# Altium PCB TIDA-00620.PcbDoc (part 1 of 2)
Units mil, origin at the board's own origin, x right, y up, seen from the top; angles counter-clockwise.
Board outline 3000 x 1500 mil, 2 copper layers (Top Layer, Bottom Layer), stack 64.8 mil thick; 82 components, 49 nets, 221 pads, 316 vias.
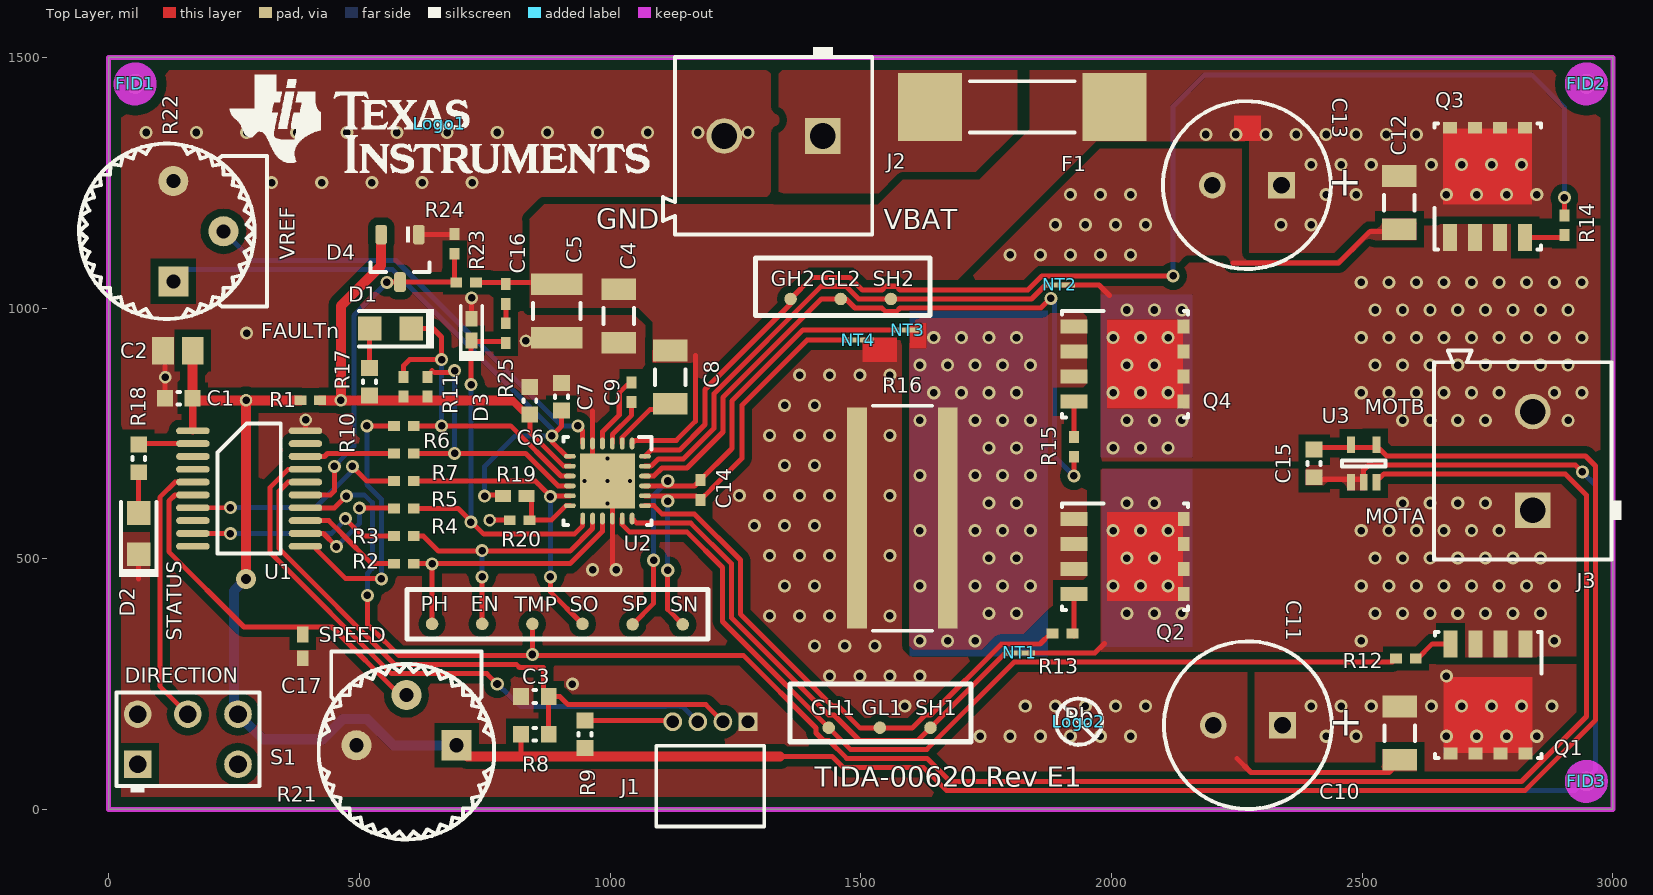
[diagram p0: Top Layer view]
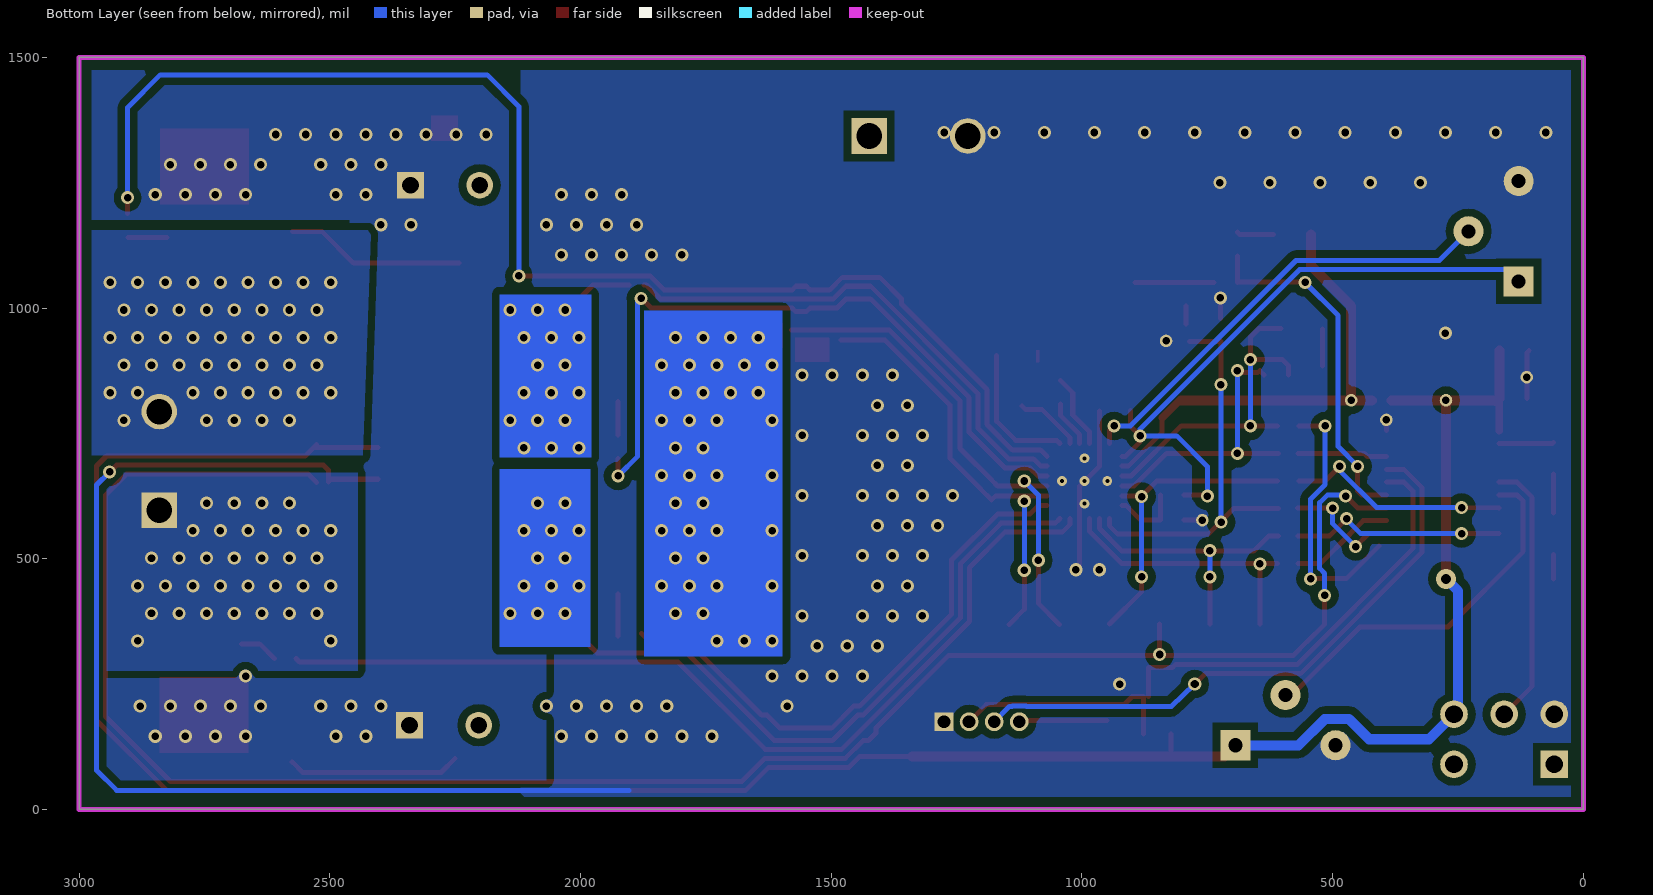
[diagram p1: Bottom Layer view, seen from below]

## Layer stack, top to bottom
Top Solder: solder mask 0.4, Solder Resist, Dk 3.5
Top Layer: signal copper 2.8
Dielectric1: core 59.2, FR-4, Dk 4.8
Bottom Layer: signal copper 2.8
Bottom Solder: solder mask 0.4, Solder Resist, Dk 3.5

## Board outline
0,0 0,1500 3000,1500 3000,0

## Design rules (kind name [scope] priority, off if disabled: settings)
AcuteAngle [All] p1: minimum=4.50000000000000E+0001 checktracksonly=FALSE
AssemblyTestPointUsage [All] p1: valid=2
Clearance Clearance_Keepouts [((IsTrack Or IsArc) And Not InPoly) And IsFree and IsKeepOut vs ((IsTrack Or IsArc) And Not InPoly) And IsFree and IsKeepOut] p1: gap=0
Clearance Clearance_BoardEdge_MountingHoles [OnCopper and InComponentClass('Mounting Holes') vs IsKeepOut] p2: gap=40
Clearance Clearance_BoardEdge_Poly [OnCopper and InPoly vs IsKeepOut] p3: gap=20
Clearance Clearance_BoardEdge [OnCopper and Not InComponentClass('Logo') and not InComponentClass('FiducialMark') and not InRegion(1000,500,4000,800) and Not IsKeepout vs IsKeepOut] p4: gap=20
Clearance Clearance_Poly [InPolygon] p5: gap=15
Clearance [All] p6: gap=7.87
ComponentClearance ComponentClearance_MountingHoles_FiducialMarks [InComponentClass('Mounting Holes') vs InComponentClass('FiducialMark')] p1: gap=50 collisioncheckmode=3 verticalgap=10 showdistances=FALSE
ComponentClearance ComponentClearance_Shunt [InComponentClass('Header') vs InComponentClass('Shunt')] p2: gap=0 collisioncheckmode=3 verticalgap=0 showdistances=FALSE
ComponentClearance ComponentClearance_Logo [InComponentClass('Logo')] p3: gap=50 collisioncheckmode=3 verticalgap=10 showdistances=FALSE
ComponentClearance ComponentClearance_ScrewToNut [(HasFootprint('NY PMS 440 0025 PH')) vs (HasFootprint('Keystone_1902C'))] p4: gap=5 collisioncheckmode=3 verticalgap=10 showdistances=FALSE
ComponentClearance ComponentClearance_MountingHoles [InComponentClass('Mounting Holes')] p5: gap=250 collisioncheckmode=3 verticalgap=100000 showdistances=FALSE
ComponentClearance ComponentClearance_SmallPassives [HasFootprint('0201*') or HasFootprint('0402*') or HasFootprint('0508') or HasFootprint('0603*') or HasFootprint('0612') or HasFootprint('0805*') or HasFootprint('0815*') or HasFootprint('0830*') or HasFootprint('1206*') or HasFootprint('1210*') or HasFootprint('1808*') or HasFootprint('1812*') or HasFootprint('1825*') or HasFootprint('2010*') or HasFootprint('2220*') or HasFootprint('2225*') or HasFootprint('2512*') or HasFootprint('2728*') or HasFootprint('3518*') vs HasFootprint('0201*') or HasFootprint('0402*') or HasFootprint('0508') or HasFootprint('0603*') or HasFootprint('0612') or HasFootprint('0805*') or HasFootprint('0815*') or HasFootprint('0830*') or HasFootprint('1206*') or HasFootprint('1210*') or HasFootprint('1808*') or HasFootprint('1812*') or HasFootprint('1825*') or HasFootprint('2010*') or HasFootprint('2220*') or HasFootprint('2225*') or HasFootprint('2512*') or HasFootprint('2728*') or HasFootprint('3518*')] p6: gap=20 collisioncheckmode=3 verticalgap=10 showdistances=FALSE
ComponentClearance ComponentClearance_THtoSMT [IsThruComponent vs IsSMTComponent] p7: gap=100 collisioncheckmode=3 verticalgap=30 showdistances=FALSE
ComponentClearance ComponentClearance_THtoTH [IsThruComponent vs IsThruComponent] p8: gap=118.11 collisioncheckmode=3 verticalgap=30 showdistances=FALSE
ComponentClearance [All] p9: gap=40 collisioncheckmode=3 verticalgap=10 showdistances=FALSE
DiffPairsRouting [All] p1: maxlimit=100 minlimit=10 mostfreqgap=10 toplayer_minwidth=10 toplayer_maxwidth=15 toplayer_prefwidth=15 bottomlayer_minwidth=10 bottomlayer_maxwidth=15 bottomlayer_prefwidth=15 maxuncoupledlength=1000
FabricationTestPointUsage TestPointUsage [All] p1: valid=2 allowmultiple=FALSE
FabricationTestpoint Testpoint [All] p1: side=3 testpointundercomponent=TRUE minsize=40 maxsize=100 preferedsize=60 minholesize=0 maxholesize=40 preferedholesize=32 testpointgrid=1 allowsidetop=TRUE allowsidebottom=TRUE usegrid=TRUE gridtolerance=0.01
FanoutControl Fanout_LCC [IsLCC] p1: bgadir=Out bgaviamode=Centered fanoutstyle=Auto fanoutdirection=Alternating viagrid=1 // Fanout_LCC (Default Rule)
FanoutControl Fanout_BGA [IsBGA] p2: bgadir=Out bgaviamode=Centered fanoutstyle=Auto fanoutdirection=Alternating viagrid=1 // Fanout_BGA (Default Rule)
FanoutControl Fanout_Default [All] p4: bgadir=Out bgaviamode=Centered fanoutstyle=Auto fanoutdirection=Alternating viagrid=1 // Fanout_Default (Default Rule)
FanoutControl Fanout_Small [(CompPinCount < 5)] p5: bgadir=Out bgaviamode=Centered fanoutstyle=Auto fanoutdirection=OutThenIn viagrid=1 // Fanout_Small (Default Rule)
HoleSize [All] p1: absolutevalues=TRUE maxlimit=251 minlimit=7.87 maxpercent=80.000 minpercent=20.000
MinimumAnnularRing MinimumAnnularRing_ThermalPadVias [IsVia and InAnyComponent] p1: minimumring=5.91
MinimumAnnularRing [All] p2: minimumring=5
MinimumSolderMaskSliver MinimumSolderMaskSliver_Logo [InComponentClass('Logo') vs InComponentClass('Logo')] p1: minsoldermaskwidth=0.7
MinimumSolderMaskSliver [All] p2: minsoldermaskwidth=3.94
PlaneClearance [All] p1: clearance=15
PlaneConnect [All] p1: planeconnectstyle=Direct reliefexpansion=10 reliefentries=4 reliefconductorwidth=10 reliefairgap=10
PolygonConnect [All] p1: connectstyle=Direct reliefconductorwidth=10 reliefentries=4 polygonreliefangle="90 Angle" airgapwidth=10
RoutingVias ThermalPadVias [IsVia and InAnyComponent] p1: holewidth=7.87 width=19.68 viastyle="Through Hole" minholewidth=7.87 minwidth=19.68 maxholewidth=12.99 maxwidth=23.62
RoutingVias [All] p2: holewidth=16 width=34 viastyle="Through Hole" minholewidth=7.87 minwidth=26 maxholewidth=40 maxwidth=65
SilkToBoardRegionClearance [Not ((IsComment or IsDesignator) And (Hide <> 'False')) and not InRegion(1000,500,4000,800)] p1:
SilkToSilkClearance SilkToSilkClearance_Pb-FreeLogo [(HasFootprint('Pb-Free_Overlay_Medium') OR HasFootprint('Pb-Free_Overlay_Small')) vs (HasFootprint('Pb-Free_Overlay_Medium') OR HasFootprint('Pb-Free_Overlay_Small'))] p1: silktosilkclearance=0
SilkToSilkClearance [All] p2: silktosilkclearance=5
SilkToSolderMaskClearance "Silk to Solder Mask Opening" [All] p1: minsilkscreentomaskgap=1 clearancetoexposedcopper=FALSE
SolderMaskExpansion [All] p1: expansion=1.97
UnpouredPolygon [All] p1: allowunpoured=FALSE
Width [All] p1: maxlimit=100 minlimit=6 preferedwidth=10 checkconnectedcopper=TRUE
13 further rules are at their usual default settings.

## Classes and differential pairs
component class TIDA-00620_Hardware: !PCB FID1 FID2 FID3 Logo1 Logo2 ZZ2 ZZ3 ZZ4
component class Logo: Logo1
component class FiducialMark: FID1 FID2 FID3
component class AssemblyNote: ZZ2 ZZ3 ZZ4
component class TIDA-00620_Schematic: C1 C2 C3 C4 C5 C6 C7 C8 C9 C10 C11 C12 C13 C14 C15 C16 C17 D1 D2 D3 D4 EN F1 GH1 GH2 GL1 GL2 J1 J2 J3 NT1 NT2 NT3 NT4 PH Q1 Q2 Q3 Q4 R1 R2 R3 R4 R5 R6 R7 R8 R9 R10 R11 R12 R13 R14 R15 R16 R17 R18 R19 R20 R21 R22 R23 R24 R25 S1 SH1 SH2 SN SO SP TMP U1 U2 U3
differential pair S: +S_P -S_N

## Components (designator, comment, footprint, x,y, rotation, side; value= is the part's Value field where it differs from the comment)
C1 "C0603C104K8RACTU" 0603L 140,820 r180 top
C2 "C2012X7R1A475M" 0805L 138,915 r180 top
C3 "GRM188R71C102KA01D" 0603L 850,225 r180 top
C4 "GRM319R71H104KA01D" 1206L 1017,984 r270 top
C5 "GRM32ER71H106KA12L" 1210L 894,994 r270 top
C6 "GRM188R60J105KA01D" 0603L 840,815 r90 top
C7 "GRM188R60J105KA01D" 0603L 903,823 r90 top
C8 "GRM319R71C105KAA3D" 1206L 1120,862 r270 top
C9 "GRM155R71C104KA88D" 0402L 1043,832 r90 top
C10 "GRM319R71H104KA01D" 1206L 2575,152 r270 top
C11 "EEU-FR1V471LB" CAPPRD350W60D800H2000 2272,168 r180 top
C12 "GRM319R71H104KA01D" 1206L 2574,1210 r270 top
C13 "EEU-FR1V471LB" CAPPRD350W60D800H2000 2270,1245 r180 top
C14 "GRM155R71C102KA01D" 0402L 1180,637 r270 top
C15 "GRM188R70J103KA01D" 0603L 2404,690 r270 top
C16 "GRM155R61A474KE15D" 0402L 792,1028 r90 top
C17 "GCM155R71C104KA55D" 0402 387,325 r270 top
D1 "nFAULT" LED_LTST-C170 562,959 r0 top
D2 "LTST-C171GKT" LED_LTST-C171 60,550 r270 top
D3 "BZT52C3V3T-7" SOD-523 724,957 r90 top
D4 "MMBD7000LT1G" SOT-23 581,1099 r270 top
EN "TESTPOINT" TP_25MIL-SMT 745,370 r90 top
F1 "0456030.ER" FUSE_0456030 1822,1401 r0 top
FID1 "Fiducial" Fiducial10-20 53,1447 r0 top
FID2 "Fiducial" Fiducial10-20 2947,1447 r0 top
FID3 "Fiducial" Fiducial10-20 2947,56 r0 top
GH1 "TESTPOINT" TP_25MIL-SMT 1436,163 r90 top
GH2 "TESTPOINT" TP_25MIL-SMT 1360,1018 r0 top
GL1 "TESTPOINT" TP_25MIL-SMT 1538,163 r0 top
GL2 "TESTPOINT" TP_25MIL-SMT 1460,1018 r0 top
J1 "851-43-004-20-001000" CONN_851-43-004-20-001000 1200,175 r0 top
J2 "691 101 710 002" Wurth_691101710002 1326,1343 r180 top
J3 "691 101 710 002" Wurth_691101710002 2840,695 r90 top
Logo1 "Texas Instruments" TI_Stacked_Overlay_Small 660,1367 r0 top
Logo2 "Pb-Free Symbol" Pb-Free_Overlay_Small 1935,175 r0 top
NT1 "Net-Tie" Net-Tie_10milWide_30milLong 1817,312 r0 top net-tie
NT2 "Net-Tie" Net-Tie_10milWide_30milLong 1897,1046 r180 top net-tie
NT3 "Net-Tie" Net-Tie_10milWide_30milLong 1594,956 r0 top net-tie
NT4 "Net-Tie" Net-Tie_10milWide_30milLong 1495,936 r0 top net-tie
PH "TESTPOINT" TP_25MIL-SMT 645,370 r90 top
Q1 "CSD18540Q5B" TRANS_NexFET_Q5B 2751,221 r270 top
Q2 "CSD18540Q5B" TRANS_NexFET_Q5B 2034.52,504.28 r0 top
Q3 "CSD18540Q5B" TRANS_NexFET_Q5B 2750,1250 r90 top
Q4 "CSD18540Q5B" TRANS_NexFET_Q5B 2034.3,888.09 r0 top
R1 "CRCW04020000Z0ED" 0402L 402,816 r180 top
R2 "CRCW04020000Z0ED" 0402L 588.69,490 r180 top
R3 "CRCW04020000Z0ED" 0402L 588.69,545 r180 top
R4 "CRCW04020000Z0ED" 0402L 588.69,600 r180 top
R5 "CRCW04020000Z0ED" 0402L 588.69,655 r180 top
R6 "CRCW04020000Z0ED" 0402L 588.69,765 r180 top
R7 "CRCW04020000Z0ED" 0402L 588.69,710 r180 top
R8 "CRCW060347K0JNEA" 0603L 850,150 r180 top
R9 "CRCW06030000Z0EA" 0603L 950,150 r270 top
R10 "ERJ-2RKF1002X" 0402L 588,843 r270 top
R11 "ERJ-2RKF1002X" 0402L 636,843 r270 top
R12 "CRCW04020000Z0ED" 0402L 2587,301 r0 top
R13 "CRCW04020000Z0ED" 0402L 1902.22,351.18 r0 top
R14 "CRCW04020000Z0ED" 0402L 2903,1165 r270 top
R15 "CRCW04020000Z0ED" 0402L 1925,723 r90 top
R16 "KRL11050-C-R005-F-T1" 4320 1583,581 r0 top
R17 "RC0603FR-07330RL" 0603L 520,853 r270 top
R18 "RC0603FR-07330RL" 0603L 60,700 r90 top
R19 "CRCW040268K0JNED" 0402 810,625 r0 top
R20 "CRCW04020000Z0ED" 0402L 819.69,576.81 r180 top
R21 "3352P-1-204LF" Bourns_3352P 594,128 r270 top
R22 "3352P-1-204LF" Bourns_3352P 129,1153 r180 top
R23 "CRCW040213K3FKED" 0402L 713,1051 r180 top
R24 "CRCW04021K00JNED" 0402L 690,1128 r90 top
R25 "CRCW04021K00FKED" 0402L 792,950 r270 top
S1 "200USP1T1A1M2RE" SW_200USP1T1A1M2 158,140 r90 top
SH1 "TESTPOINT" TP_25MIL-SMT 1639,163 r0 top
SH2 "TESTPOINT" TP_25MIL-SMT 1560,1018 r0 top
SN "TESTPOINT" TP_25MIL-SMT 1145,369 r0 top
SO "TESTPOINT" TP_25MIL-SMT 945,370 r0 top
SP "TESTPOINT" TP_25MIL-SMT 1045,369 r0 top
TMP "TESTPOINT" TP_25MIL-SMT 845,370 r90 top
U1 "MSP430G2553IPW20" PW0020A_N 280.31,640 r0 top
U2 "DRV8701ERGER" RGE0024F 994.69,655 r270 top
U3 "LMT86DCKT" DCK0005A_N 2503,690 r90 top
ZZ2 "These assemblies are ESD sensitive, ESD precautions shall be observed." AssemblyNote 166,1694 r0 top
ZZ3 "These assemblies must be clean and free from flux and all contaminants. Use of no clean flux is not acceptable." AssemblyNote 166,1889 r0 top
ZZ4 "These assemblies must comply with workmanship standards IPC-A-610 Class 2, unless otherwise specified." AssemblyNote 168,2084 r0 top

## Footprints (in the part's own frame and the unit in brackets; to place one, negate y for a bottom-side part, rotate by r counter-clockwise, add the part's x,y. Pads: shape width x height; smd on the part's side, far side on the other; paste and mask are expansions set on the pad)
0402 [mm] "0402 from SM-752 data"
  rect 0.8x0.6 smd: 1(-0.6,0) 2(0.6,0)
  body extent -0.55,-0.3 0.55,0.3, height 0.6
0402L [mm] "0402 from SM-752 data"
  rect 0.6x0.5 smd: 1(-0.5,0) 2(0.5,0)
  body extent -0.55,-0.3 0.55,0.3, height 0.6
0603L [mm] "0603 from SM-752 data"
  rect 0.8x0.85 smd: 1(-0.7,0) 2(0.7,0)
  silkscreen extent -0.07,-0.33 0.07,0.33, body extent -0.87,-0.47 0.87,0.47, height 0.85
0805L [mm] "0805 from SM-752 data"
  rect 1.1x1.4 smd: 1(-0.75,0) 2(0.75,0)
  body extent -1.1,-0.72 1.1,0.72, height 1.1
1206L [mm] "1206 from SM-752 data"
  rect 1.1x1.75 smd: 1(-1.35,0) 2(1.35,0)
  silkscreen extent -0.4,-0.77 0.4,0.77, body extent -1.7,-0.9 1.7,0.9, height 1.35
1210L [mm] "1210 from SM-752 data"
  rect 1.1x2.6 smd: 1(-1.35,0) 2(1.35,0)
  silkscreen extent -0.4,-1.2 0.4,1.2, body extent -1.7,-1.35 1.7,1.35, height 1.35
4320 [mm] "SUSUMU"
  rect 1x11.2 smd: 1(-2.3,0) 2(2.3,0)
  silkscreen extent -1.5,-5.7 1.5,5.7, body extent -2.6,-5.6 2.6,5.6, height 0.7
AssemblyNote [mil] "Assembly Note"
Bourns_3352P [mil] "Bourns"
  rect 60x60 hole 28: 1(0,100)
  round 60 hole 28: 2(-100,0) 3(0,-100)
  silkscreen extent -187,-175 188,175, body extent -187,-175 193,175, height 212
CAPPRD350W60D800H2000 [mm] "Panasonic"
  rect 1.35x1.35 hole 0.85: 1(-1.75,0)
  round 1.35 hole 0.85: 2(1.75,0)
  silkscreen extent -4.25,-4.25 4.25,4.25, body extent -4.22,-4.24 4.24,4.24, height 22.01
CONN_851-43-004-20-001000 [mm] "MILL-MAX"
  rect 0.95x0.95 hole 0.65: 1(1.905,0)
  round 0.95 hole 0.65: 2(0.635,0) 3(-0.635,0) 4(-1.905,0)
  silkscreen extent -2.73,-5.31 2.73,-1.22, body extent -2.73,-5.31 2.73,0.23, height 2.23
DCK0005A_N [mm] "SOT353, 5-Leads, Body 2x1.3mm, Pitch 0.65mm, Lead Span 2.1mm, IPC Medium Density"
  rect 0.85x0.4 smd: 1(-0.95,0.65) 2(-0.95,0) 3(-0.95,-0.65) 4(0.95,-0.65) 5(0.95,0.65)
  silkscreen extent -0.15,-1.1 0.15,1.1, body extent -1.14,-1 1.14,1, height 0.94
Fiducial10-20 [mm]
  round 1 smd mask+0.5: 1(0,0)
  Top Layer keep-out circle w1.178: c0,0 r0.5
FUSE_0456030 [mm] "SMD, 2-Leads, Body 10.1x3.12mm"
  rect 3.25x3.43 smd: 1(-4.675,0) 2(4.675,0)
  silkscreen extent -2.65,-1.3 2.65,1.3, body extent -5.05,-1.56 5.05,1.56, height 3.12
LED_LTST-C170 [mm] "LITE-ON"
  rect 1.2x1.2 smd: 1(-1.05,0) 2(1.05,0)
  silkscreen extent -1.6,-1 2.2,1, body extent -1.05,-0.67 1.05,0.67, height 1.1
LED_LTST-C171 [mm] "LITE-ON"
  rect 1.2x1.2 smd: 1(-1.05,0) 2(1.05,0)
  silkscreen extent -1.6,-1 2.2,1, body extent -1.05,-0.67 1.05,0.67, height 0.8
Net-Tie_10milWide_30milLong [mil] "10mil net tie, no solder mask opening, no solder paste"
  rect 30x10 smd paste-5 mask-5: 1(-15,0) 2(15,0)
Pb-Free_Overlay_Small [mil]
  silkscreen extent -46,-46 46,46
PW0020A_N [mm] "TSOP, 20-Leads, Body 6.5x4.4mm, Pitch 0.65mm, IPC Medium Density"
  oval 1.7x0.35 smd: 1(-2.85,2.925) 2(-2.85,2.275) 3(-2.85,1.625) 4(-2.85,0.975) 5(-2.85,0.325) 6(-2.85,-0.325) 7(-2.85,-0.975) 8(-2.85,-1.625) 9(-2.85,-2.275) 10(-2.85,-2.925) 11(2.85,-2.925) 12(2.85,-2.275) 13(2.85,-1.625) 14(2.85,-0.975) 15(2.85,-0.325) 16(2.85,0.325) 17(2.85,0.975) 18(2.85,1.625) 19(2.85,2.275) 20(2.85,2.925)
  silkscreen extent -1.6,-3.3 1.6,3.3, body extent -3.21,-3.25 3.21,3.25, height 0.99
RGE0024F [mm] "QFN, 24-Leads, Body 4x4mm, Pitch 0.5mm, Thermal Pad 2.8x2.8mm, TI Recommended"
  oval 0.6x0.24 smd: 1(-1.9,1.25) 2(-1.9,0.75) 3(-1.9,0.25) 4(-1.9,-0.25) 5(-1.9,-0.75) 6(-1.9,-1.25) 13(1.9,-1.25) 14(1.9,-0.75) 15(1.9,-0.25) 16(1.9,0.25) 17(1.9,0.75) 18(1.9,1.25)
  oval 0.24x0.6 smd: 7(-1.25,-1.9) 8(-0.75,-1.9) 9(-0.25,-1.9) 10(0.25,-1.9) 11(0.75,-1.9) 12(1.25,-1.9) 19(1.25,1.9) 20(0.75,1.9) 21(0.25,1.9) 22(-0.25,1.9) 23(-0.75,1.9) 24(-1.25,1.9)
  rect 2.8x2.8 smd paste-1.4: 25(0,0)
  silkscreen extent -2.22,-2.22 2.22,2.22, body extent -2.07,-2.07 2.08,2.08, height 1.01
SOD-523 [mm] "NXP Semiconductor recommended land pattern, nominal STEP model"
  rect 0.8x0.6 smd paste-0.05: 1(-0.55,0) 2(0.55,0)
  silkscreen extent -1.6,-0.64 1.2,0.63, body extent -0.8,-0.4 0.8,0.4, height 0.72
SOT-23 [mm] "SOT23, 3-Leads, Body 2.9x1.3mm, Pitch 0.95mm, Lead Span 2.5mm, IPC Medium Density"
  rrect50% 1x0.6 smd: 1(-1.2,0.95) 2(-1.2,-0.95) 3(1.2,0)
  silkscreen extent -1.63,-1.5 0.7,1.5, body extent -1.16,-1.45 1.21,1.45, height 1
SW_200USP1T1A1M2 [mm] "TH, 5-Leads, Body 7x4.5mm, Pitch 2.54mm"
  rect 1.4x1.4 hole 0.9: 1(-1.27,2.54)
  round 1.4 hole 0.9: 3(-1.27,-2.54) 4(1.27,2.54) 5(1.27,0) 6(1.27,-2.54)
  silkscreen extent -2.7,-3.63 2.38,3.63, body extent -2.37,-3.62 2.38,3.63, height 11.13
TI_Stacked_Overlay_Small [mil]
  silkscreen extent -418,-98 418,98
TP_25MIL-SMT [mil]
  round 25 smd mask-2.5: 1(0,0)
TRANS_NexFET_Q5B [mm] "TI recommended land pattern (nominal) November 2012"
  rect 1.372x0.71 smd paste-0.4: 1(-2.776,1.905) 2(-2.776,0.635) 3(-2.776,-0.635) 4(-2.776,-1.905)
  rect 0.59x0.71 smd paste-0.3: 5(2.776,-1.905) 6(2.776,-0.635) 7(2.776,0.635) 8(2.776,1.905)
  Top Layer region: -1.106,-2.26 2.744,-2.26 2.744,2.26 -1.106,2.26
  silkscreen extent -3.38,-2.7 3,2.7, body extent -3.23,-2.55 2.87,2.55, height 1.06
Wurth_691101710002 [mm] "Terminal Block, 5 mm, 2x1, TH"
  rect 1.8x1.8 hole 1.3: 1(-2.5,0)
  round 1.8 hole 1.3: 2(2.5,0)
  silkscreen extent -5,-4.5 5.6,5, body extent -5.6,-4 5.6,5, height 12.5

## Part data
C1: "CAP, CERM, 0.1uF, 10V, +/-10%, X7R, 0603"
C2: "CAP, CERM, 4.7uF, 10V, +/-20%, X7R, 0805"
C3: "CAP, CERM, 1000pF, 16V, +/-10%, X7R, 0603"
C4 C10 C12: "CAP, CERM, 0.1 µF, 50 V, +/- 10%, X7R, 1206"
C5: "CAP, CERM, 10 µF, 50 V, +/- 10%, X7R, 1210"
C6 C7: "CAP, CERM, 1 µF, 6.3 V, +/- 10%, X5R, 0603"
C8: "CAP, CERM, 1 µF, 16 V, +/- 10%, X7R, 1206"
C9 C17: "CAP, CERM, 0.1 µF, 16 V, +/- 10%, X7R, 0402"
C11 C13: "CAP, AL, 470 µF, 35 V, +/- 20%, 0.03 ohm, TH"
C14: "CAP, CERM, 1000pF, 16V, +/-10%, X7R, 0402"
C15: "CAP, CERM, 0.01 µF, 6.3 V, +/- 10%, X7R, 0603"
C16: "CAP, CERM, 0.47 µF, 10 V, +/- 10%, X5R, 0402"
D1: library part LTST-C170KRKT, "LED, Red, SMD"
D2: "LED, Green, SMD"
D3: "Diode, Zener, 3.3 V, 300 mW, SOD-523"
D4: "Diode, Switching, 100 V, 0.2 A, SOT-23"
EN GH1 GH2 GL1 GL2 PH SH1 SH2 SN SO SP TMP: "TEST POINT.  No entry in BOM."
F1: "Fuse, 30 A, 72 V, SMD"
FID1 FID2 FID3: "Fiducial mark.  There is nothing to buy or mount."
J1: "SOCKET .050\" GRID SIP 4 POS R/A, TH"
J2 J3: "Terminal Block, 5 mm, 2x1, Tin, TH"
Logo1: library part TI_Logo, "Texas Instrument Corporate Signature"
Logo2: library part Pb-Free
NT1 NT2 NT3 NT4: "Single point connection between nets."
Q1 Q2 Q3 Q4: "MOSFET, N-CH, 60 V, 28 A, SON 5x6mm"
R1 R2 R3 R4 R5 R6 R7 R12 R13 R14 R15 R20: "RES, 0, 5%, 0.063 W, 0402"
R8: "RES, 47k ohm, 5%, 0.1W, 0603"
R9: "RES, 0 ohm, 5%, 0.1W, 0603"
R10 R11: "RES, 10.0 k, 1%, 0.1 W, 0402"
R16: "RES, 0.005, 1%, 6 W, 4320_WIDE"
R17 R18: "RES, 330, 1%, 0.1 W, 0603"
R19: "RES, 68 k, 5%, 0.063 W, 0402"
R21 R22: "Trimmer, 200 K, 0.5 W, TH"
R23: "RES, 13.3 k, 1%, 0.063 W, 0402"
R24: "RES, 1.0 k, 5%, 0.063 W, 0402"
R25: "RES, 1.00 k, 1%, 0.063 W, 0402"
S1: "Switch, SPDT, On-On, 2 Pos, TH"
U1: "16 MHz Mixed Signal Microcontroller with 16 KB Flash, 512 B SRAM and 24 GPIOs, -40 to 85 degC, 20-pin SOP (PW), Green (RoHS & no Sb/Br)"
U2: "H-Bridge Gate Driver, RGE0024F"
U3: "Analog Temperature Sensors with Class-AB Output, DCK0005A"
ZZ2 ZZ3 ZZ4: library part AssemblyNote

## Free pads (board coordinates)
  round 25 hole 15: 0(113,862) 0(274,816) 0(393,777) 0(463,816) 0(759.69,576.81) 0(832.28,934.51)

## Via types
v1: diameter 26, hole 15, Top Layer to Bottom Layer, tented both sides, 270 vias
v2: diameter 26, hole 15, Top Layer to Bottom Layer, 39 vias
v3: diameter 19.68, hole 7.87, Top Layer to Bottom Layer, 5 vias
v4: diameter 40, hole 20, Top Layer to Bottom Layer, 1 vias
v5: diameter 26, hole 16, Top Layer to Bottom Layer, 1 vias

## Nets (pads, with @x,y where several pads share a name; then routed paths per layer and width w, separated by ;. In a path a pad name is that pad's centre, name@x,y a point inside that pad or via, vN(x,y) a via of type N, cw(c..) or ccw(c..) an arc to the next point about the centre after c; other vN are vias at no path point)
AVDD: C7.1 R19.1 R22.1 U2.7 | length 1282.8
  Top Layer w10: v2@759.69,626.81 R19.1@796.06,626.81 ; C7.1@903,795.44 903,764 v2(884,745) 884,733.4 913.19,704.21 U2.7@919.88,704.21
  Bottom Layer w10: R22.1@129,1053 152.87,1076.87 565.72,1076.87 884,758.59 v2(884,745) 811,745 750,684 v2(750,625)
DIRECTION: S1.5 U1.5 | length 534.1
  Top Layer w10: S1.5@158,190 102.13,245.87 102.13,622.4 132.52,652.8 U1.5@168.11,652.8
DVCC_MSP: C1.1 C2.1 C15.1 pad.0@274,816 R1.2 R8.2 R9.2 R21.1 S1.6 U1.1 U3.4 U3.5 | length 5008.6
  Top Layer w10: 822.44,108.56 R8.2@822.44,150 ; 1339,106 1442.44,106 1464.44,84 1624.72,84 1670.72,38 2825,38 2965,178 2965,685 2945.13,704.87 2549,705 U3.4@2526.47,727.53 ; C15.1@2404,721.5 U3.4@2532.5,721.5
  Top Layer w15: U1.1@167.56,755.71 C1.1@167.56,820
  Top Layer w20: C2.1@167.53,915 C1.1@167.56,820 C1.1@173.56,814 ; C1.1@173.56,816 R1.2@383,816 ; v4(274,460) pad.0@274,814 ; R21.1@694,128 716,106 1339,106
  Bottom Layer w10: S1.6@250,198 S1.6@258,190
  Bottom Layer w20: S1.6@250,198 250,436 v4(274,460) ; S1.6@258,190 308,140 427,140 467,180 516,180 568,128 R21.1@694,128
DVDD: C6.1 D4.2 pad.0@463,816 R1.1 R10.2 R11.2 R17.2 U2.8 | length 932.4
  Top Layer w10: C6.1@840,783.5 840,781 840,752.12 907.59,684.53 U2.8@919.88,684.53
  Top Layer w15: 805,816 C6.1@840,781
  Top Layer w20: R1.1@422,816 pad.0@463,816 ; D4.2@543.6,1146.24 543.6,1084.6 463,1004 pad.0@463,816 ; 802,816 pad.0@463,816
EN/IN2_DRV: EN.1 R3.1 U2.14 | length 553.9
  Top Layer w10: R3.1@608.37,545 628.01,545 658.01,515 919.96,515 965.16,560.19 U2.14@965.16,580.2 ; EN.1@745,370 v2(745,464)
  Bottom Layer w10: v2(745,464) v2(745,516)
EN/IN2_MSP: R3.2 U1.9 | length 428.6
  Top Layer w10: U1.9@168.11,550.43 v2(243,550) ; v2(472,580) 506,546 ; 506,545 R3.2@569,545
  Bottom Layer w10: v2(243,550) 444.12,550 472,577.88 v2(472,580)
FAULTN_DRV: D1.2 R6.1 R10.1 U2.9 | length 695.1
  Top Layer w10: R10.1@588,866.62 588,885 600,897 v2(664,897) 664,942 647,959 D1.2@603.34,959 ; R6.1@610.34,765 v2(664,765) 801.84,765 902,664.84 U2.9@919.88,664.84
  Bottom Layer w10: v2(664,765) v2(664,897)
FAULTN_MSP: R6.2 U1.11 | length 531.4
  Top Layer w10: U1.11@408,525 472.84,460.16 v2@543.84,460.16 ; v2(515,765) R6.2@567.05,765
  Bottom Layer w10: v2(515,765) 515,647.87 543.75,619.12 v2@543.75,460.25
  other v2: 544,460
GH1: GH1.1 R12.1 U2.17 | length 1879.3
  Top Layer w10: U2.17@1024.21,580.2 1024.21,567.91 1039.12,553 1153.9,553 1224.25,482.65 1224.25,374.75 1479.25,119.75 1631.75,119.75 1806,294 2560.32,294 R12.1@2567.32,301
GH2: GH2.1 R14.1 U2.24 | length 2658.7
  Top Layer w10: U2.24@1069.49,704.21 1082.28,717 1138.72,717 1189.29,767.57 1189.29,837.29 1360,1008 GH2.1@1360,1018 1403.25,1061.25 1477.91,1061.25 1503.16,1036 1542.12,1036 1549.49,1043.37 1570.51,1043.37 1577.88,1036 1833,1036 1861,1064 v2(2123,1064) ; R14.1@2903,1188.62 v2(2903,1220)
  Bottom Layer w10: v2(2123,1064) 2123,1402 2186,1465 2838,1465 2903,1400 v2(2903,1220)
GL1: GL1.1 R13.1 U2.19 | length 1134.5
  Top Layer w10: U2.19@1069.49,605.79 1087.21,605.79 1104,589 1168.45,589 1260,497.45 1260,389.56 1443.31,206.25 1454.75,206.25 1499,162 1602,162 1628.37,188.37 1639.1,188.37 1780.47,329.75 1780.75,329.75 1780.87,329.87 1857.29,329.87 R13.1@1878.6,351.18
GL2: GL2.1 R15.1 U2.22 | length 1425.8
  Top Layer w10: U2.22@1069.49,664.84 1087.37,664.84 1103.53,681 1153.28,681 1225.04,752.76 1225.04,821.88 1421.16,1018 1470.61,1018 1488.48,1000.13 1541.99,1000.13 1549.49,992.63 1570.51,992.63 1578.01,1000.13 1859.13,1000.13 v2@1878.77,1019.77 ; v2(1925,665) R15.1@1925,699.38
  Bottom Layer w10: v2(1879,1019) 1880,1019 1885.87,1013.13 1885.87,704.13 v2(1925,665)
GND: C1.2 C2.2 C3.2 C4.2 C5.2 C6.2 C7.2 C10.2 C11.2 C12.2 C13.2 C15.2 C17.2 D2.2 D3.2 D4.1 J1.1 J2.2 NT4.2 pad.0@113,862 pad.0@393,777 pad.0@759.69,576.81 pad.0@832.28,934.51 R16.1 R20.2 R21.3 R22.3 R24.2 S1.4 U1.20 U2.5 U2.16 U2.25 U3.1 U3.2 | length 3614.2
  Top Layer w10: 60,460 D2.2@60,508.66 ; C2.2@108.47,915 112.44,911.03 C1.2@112.44,820 ; U1.20@393,755.64 pad.0@393,777 ; D4.1@618.4,1146.24 684.62,1146.24 R24.2@690,1151.62 ; D3.2@724,978.65 v2(724,1020) ; pad.0@759.69,576.81 R20.2@796.06,576.81 ; 965.16,794.84 U2.5@965.16,729.8 965.16,684.53 v3(994.69,655) 1004.53,645.16 U2.16@1004.53,580.2 1004.53,485.47 v2(1012,478) ; 2242,1090 2452.87,1089.87 2515.91,1152.91 C12.2@2574,1152.91 ; 2250,102 2278.25,73.75 2553.84,73.75 C10.2@2575,94.91 ; C15.2@2404,658.5 2497.09,658.5 U3.2@2503,652.6 2503,677 2513,687 2925,687 v2(2939,673)
  Bottom Layer w10: 1903,38 2925,38 2965,78 2965,647 v2(2939,673)
  other v1: 1738,146 1798,146 1858,146 1918,146 1978,146 2038,146 1588,206 1828,206 1888,206 1948,206 2008,206 2068,206 925,250 1438,266 1498,266 1558,266 1618,266 1408,326 1468,326 1528,326 1318,386 1378,386 1438,386 1558,386 1348,446 1408,446 1318,506 1378,506 1438,506 1558,506 1288,566 1348,566 1408,566 1258,626 1318,626 1378,626 1438,626 1558,626 1348,686 1408,686 1318,746 1378,746 1438,746 1558,746 1348,806 1408,806 1378,866 1438,866 1498,866 1558,866 275,950 1798,1106 1858,1106 1918,1106 1978,1106 2038,1106 1888,1166 1948,1166 2008,1166 2068,1166 1918,1226 1978,1226 2038,1226 325,1250 425,1250 525,1250 625,1250 725,1250 75,1350 175,1350 275,1350 375,1350 475,1350 575,1350 675,1350 775,1350 875,1350 975,1350 1075,1350 1175,1350 1275,1350
  other v2: 965,478
  other v3: 994.69,609.72 949.41,655 1039.96,655 994.69,700.28
IDRIVE: R19.2 R20.1 U2.12 | length 138.6
  Top Layer w10: R19.2@843.31,626.81 843.31,576.81 882.81,576.81 911.79,605.79 U2.12@919.88,605.79
M_A: J3.1 NT1.2 Q1.1 Q1.2 Q1.3 Q2.5 Q2.6 Q2.7 Q2.8 | length 161.9
  Top Layer w10: NT1.2@1832,312 1966.87,312 1986,331.13
  other v1: 2498,336 2883,336 2030.5,391 2085.5,391 2140.5,391 2525.5,391 2580.5,391 2635.5,391 2690.5,391 2745.5,391 2800.5,391 2855.5,391 2003,446 2058,446 2113,446 2498,446 2553,446 2608,446 2663,446 2718,446 2773,446 2828,446 2883,446 2030.5,501 2085.5,501 2525.5,501 2580.5,501 2635.5,501 2690.5,501 2745.5,501 2800.5,501 2855.5,501 2003,556 2058,556 2113,556 2498,556 2553,556 2608,556 2663,556 2718,556 2773,556 2030.5,611 2085.5,611 2580.5,611 2635.5,611 2690.5,611 2745.5,611
M_B: J3.2 NT2.1 Q3.1 Q3.2 Q3.3 Q4.5 Q4.6 Q4.7 Q4.8 | length 101.7
  Top Layer w10: NT2.1@1903,1046 1975,1046 1996,1025
  other v1: 2003,721 2058,721 2113,721 2030.5,776 2085.5,776 2140.5,776 2580.5,776 2635.5,776 2690.5,776 2745.5,776 2910.5,776 2003,831 2058,831 2113,831 2498,831 2553,831 2608,831 2663,831 2718,831 2773,831 2883,831 2938,831 2030.5,886 2085.5,886 2525.5,886 2580.5,886 2635.5,886 2690.5,886 2745.5,886 2800.5,886 2855.5,886 2910.5,886 2003,941 2058,941 2113,941 2498,941 2553,941 2608,941 2663,941 2718,941 2773,941 2828,941 2883,941 2938,941 2030.5,996 2085.5,996 2140.5,996 2525.5,996 2580.5,996 2635.5,996 2690.5,996 2745.5,996 2800.5,996 2855.5,996 2910.5,996 2498,1051 2553,1051 2608,1051 2663,1051 2718,1051 2773,1051 2828,1051 2883,1051 2938,1051
NetC8_2: C8.2 U2.2 | length 134.1
  Top Layer w10: U2.2@1024.21,729.8 1024.21,742.09 1080,797.88 1112.97,797.88 C8.2@1120,804.91
NetC9_1: C9.1 U2.3 | length 94.5
  Top Layer w10: U2.3@1004.53,729.8 1004.53,747.68 1043,786.16 C9.1@1043,808.38
NetC9_2: C9.2 U2.4 | length 149.9
  Top Layer w10: U2.4@984.84,729.8 984.84,753.28 1018.32,786.75 1018.32,830.94 C9.2@1043,855.62
NetC16_1: C16.1 R25.1 | length 36.7
  Top Layer w10: R25.1@792,967.72 C16.1@792,1004.38
NetD1_1: D1.1 R17.1 | length 73.8
  Top Layer w10: R17.1@520,884.5 D1.1@520,958.34
NetD2_1: D2.1 R18.1 | length 77.2
  Top Layer w10: D2.1@60,591.34 R18.1@60,668.5
NetJ1_4: J1.4 R9.1 | length 172.4
  Top Layer w10: R9.1@950,177.56 J1.4@1122.44,177.56
NetNT3_2: NT3.2 Q2.1 Q2.2 Q2.3 Q4.1 Q4.2 Q4.3 R16.2
  other v1: 1618,336 1673,336 1728,336 1755.5,391 1810.5,391 1618,446 1728,446 1783,446 1838,446 1755.5,501 1810.5,501 1618,556 1728,556 1783,556 1838,556 1755.5,611 1810.5,611 1618,666 1728,666 1783,666 1838,666 1755.5,721 1810.5,721 1618,776 1728,776 1783,776 1838,776 1645.5,831 1700.5,831 1755.5,831 1810.5,831 1618,886 1673,886 1728,886 1783,886 1838,886 1645.5,941 1700.5,941 1755.5,941 1810.5,941
NetQ1_4: Q1.4 R12.2 | length 77.5
  Top Layer w10: R12.2@2610.62,301 2639.93,330.3 Q1.4@2676,330.3
NetQ2_4: Q2.4 R13.2 | length 82.9
  Top Layer w10: R13.2@1925.22,346.35 Q2.4@1925.22,429.28
NetQ3_4: Q3.4 R14.2 | length 77.3
  Top Layer w10: Q3.4@2825,1140.7 R14.2@2902.32,1140.7
NetQ4_4: Q4.4 R15.2 | length 66.5
  Top Layer w10: R15.2@1925,746.62 Q4.4@1925,813.09